# Altium PCB PCB_MainBoard_Final.PcbDoc
Units mm, origin at the board's own origin, x right, y up, seen from the top; angles counter-clockwise.
Board outline 88.65 x 83.57 mm, 2 copper layers (Top Layer, Bottom Layer); 24 components, 28 nets, 109 pads, 5 vias.
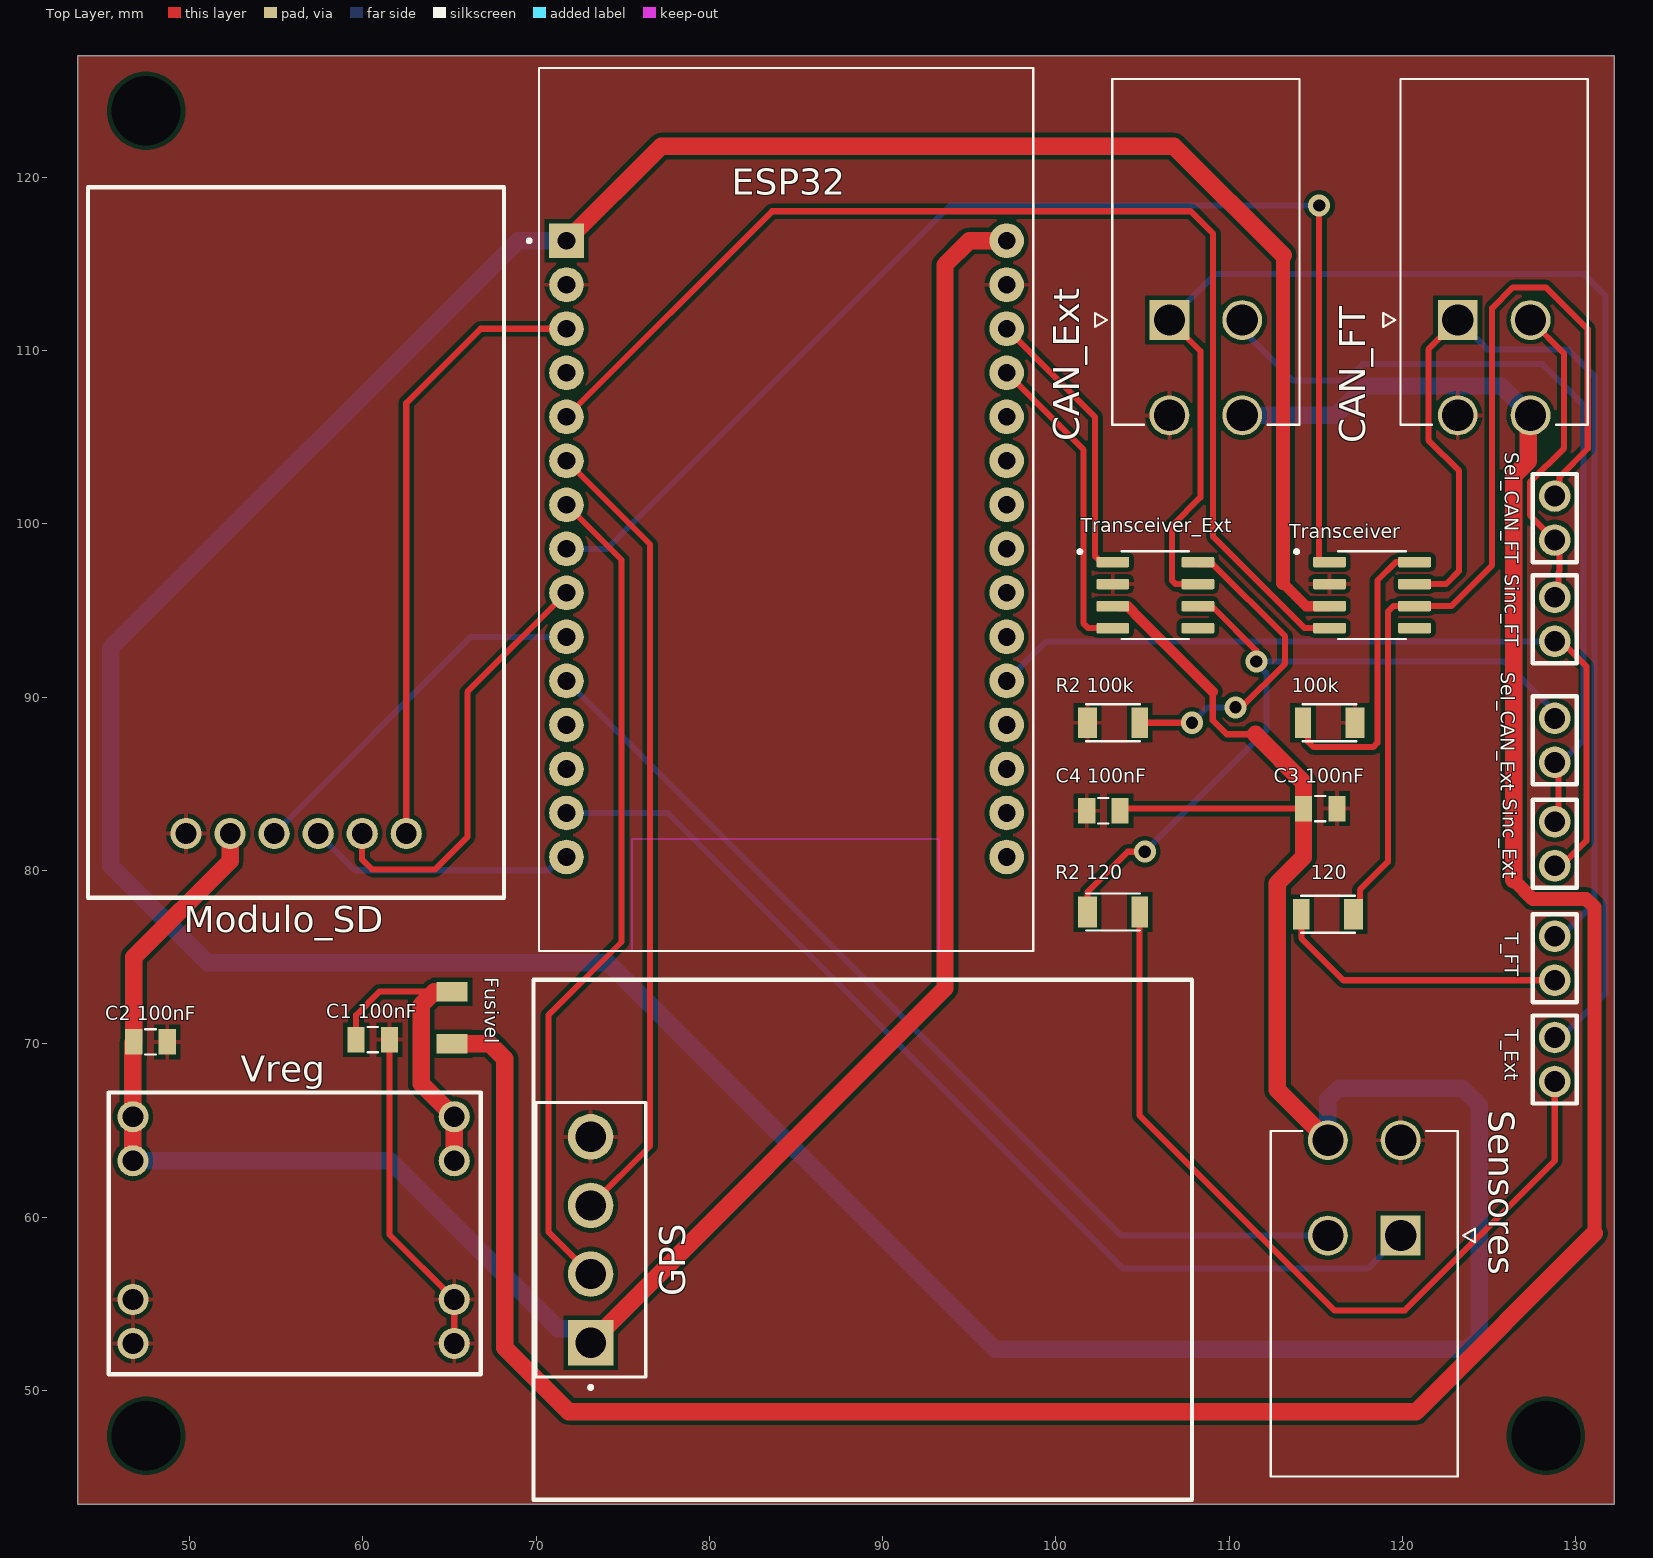
[diagram p0: Top Layer view]
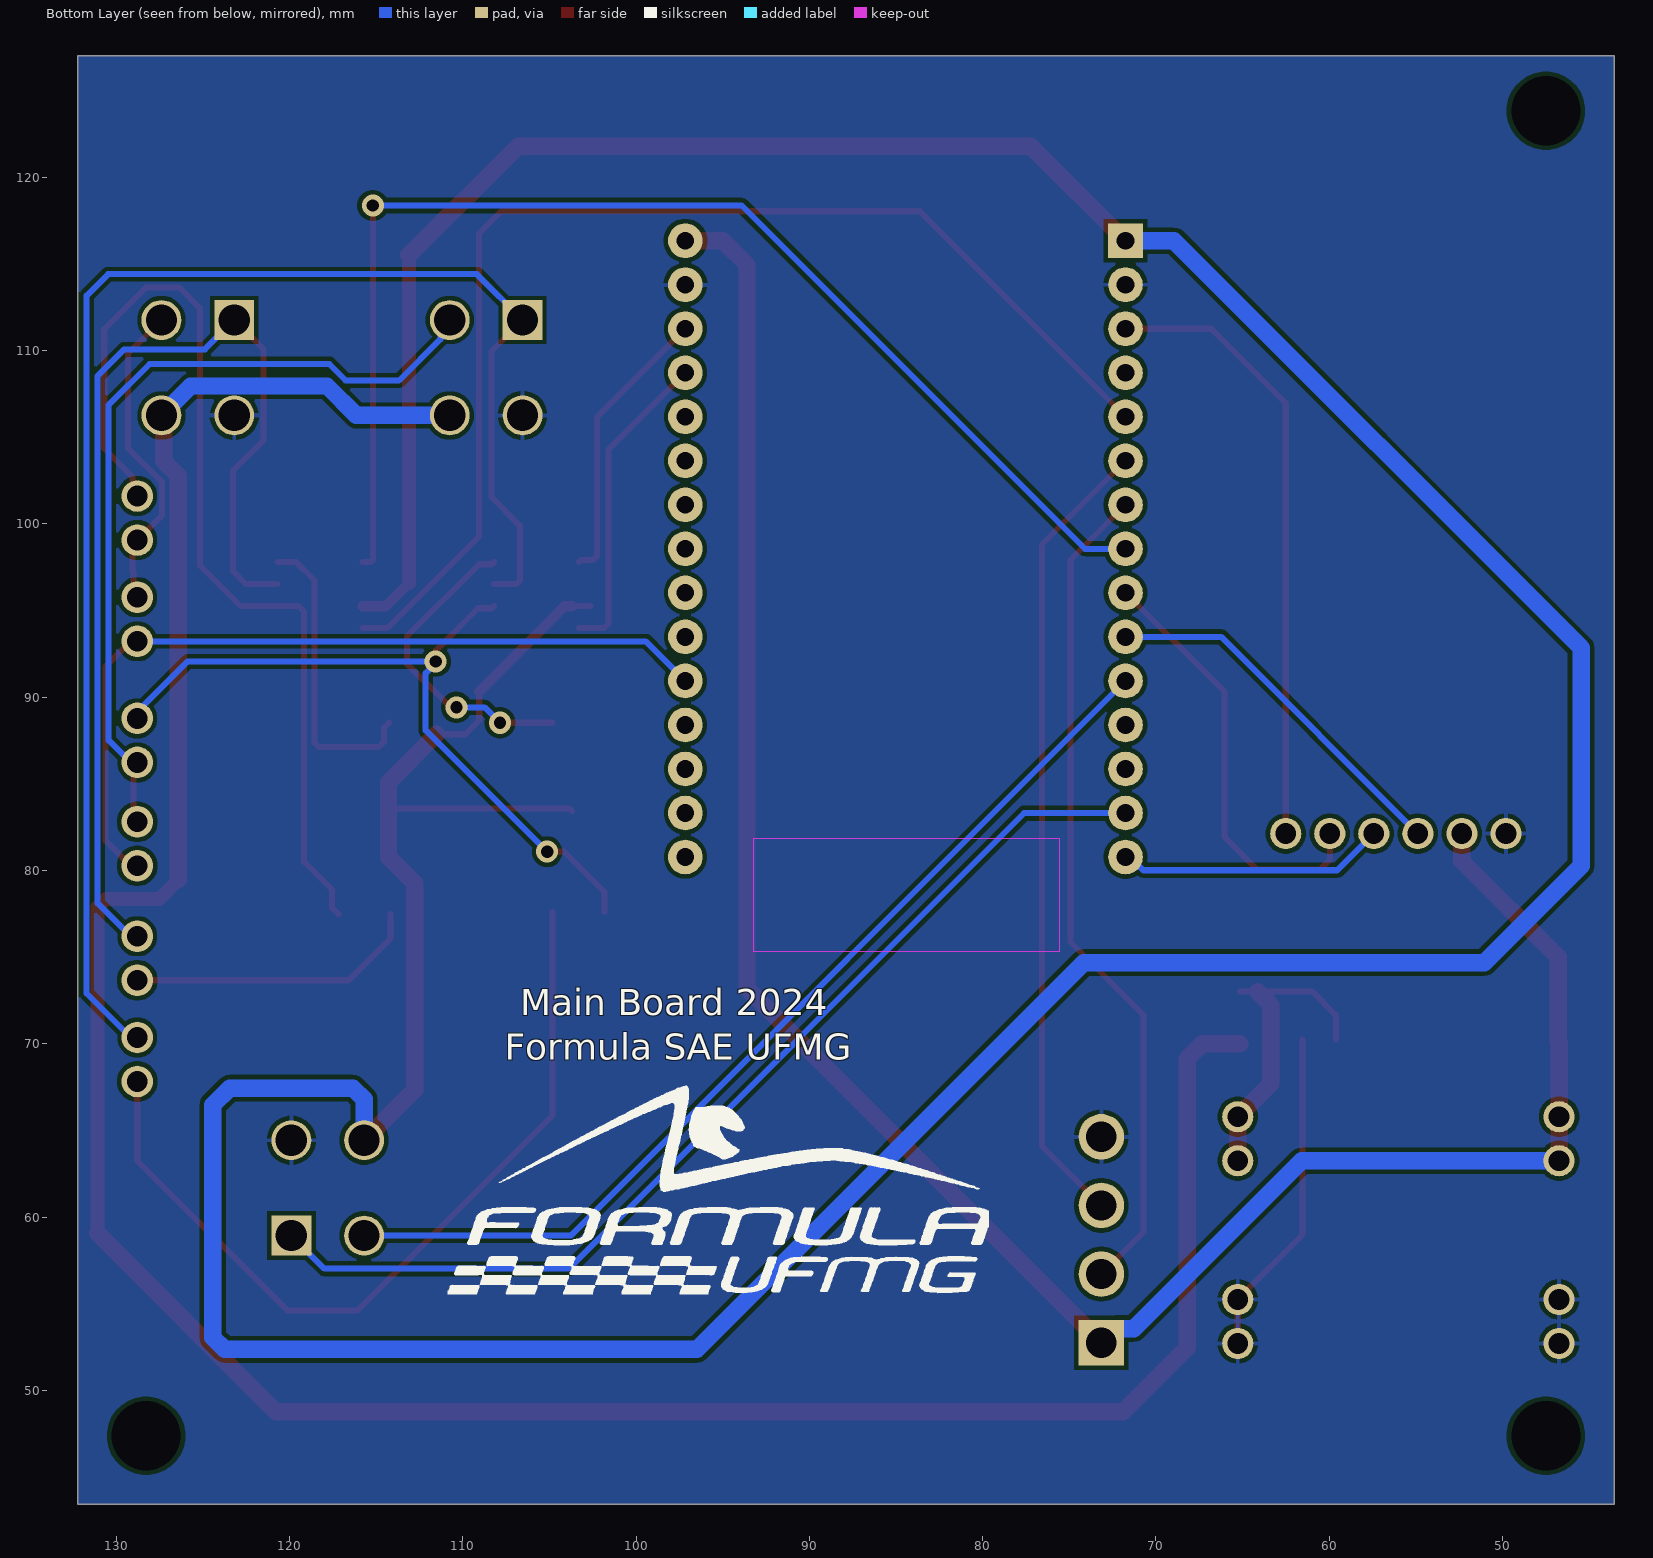
[diagram p1: Bottom Layer view, seen from below]

## Layer stack, top to bottom
Top Solder: solder mask 0.0102, Solder Resist, Dk 3.5
Top Layer: signal copper 0.0356
Dielectric 1: dielectric 0.32, FR-4, Dk 4.8
Bottom Layer: signal copper 0.0356
Bottom Solder: solder mask 0.0102, Solder Resist, Dk 3.5

## Board outline
43.561,43.434 132.207,43.434 132.207,127 43.561,127

## Design rules (kind name [scope] priority, off if disabled: settings)
Clearance [All] p1: gap=0.254 ignorepadtopadclearanceinfootprint=FALSE except(0: Arc-Hole Track-Hole SMDPad-Hole THPad-Hole Via-Hole Fill-Hole Poly-Hole Region-Hole Text-Hole; 0.35: Arc-SMDPad Arc-THPad Arc-Via Track-SMDPad Track-THPad Track-Via SMDPad-Via THPad-Via Via-Via)
PolygonConnect [All] p1: connectstyle=Relief reliefconductorwidth=0.254 reliefentries=4 polygonreliefangle="90 Angle" airgapwidth=0.254
RoutingVias [All] p1: holewidth=0.711 width=1.27 viastyle="Through Hole" minholewidth=0.711 minwidth=1.27 maxholewidth=0.711 maxwidth=1.27
SolderMaskExpansion [All] p1: expansion=0.102 istentingtop=FALSE
Width [All] p1: maxlimit=0.4 minlimit=0.254 preferedwidth=0.35 minimp=50.000000 maximp=50.000000 favimp=50.000000
30 further rules are at their usual default settings.

## Classes and differential pairs
component class Esquematico_MainBoard: 100k 120 "C1 100nF" "C2 100nF" "C3 100nF" "C4 100nF" Fusivel GPS Modulo_SD "R2 100k" "R2 120" Sensores Sinc_Ext Sinc_FT T_Ext T_FT

## Components (designator, comment, footprint, x,y, rotation, side; value= is the part's Value field where it differs from the comment)
100k "CRG1206F620K" RESC3115X65N 115.794,88.519 r180 top
120 "CRG1206F620K" RESC3115X65N 115.697,77.47 r180 top
"C1 100nF" "C2012X5R1E225M085AC" *CAPC2012X100N 60.579,70.231 r180 top
"C2 100nF" "C2012X5R1E225M085AC" *CAPC2012X100N 47.752,70.104 r180 top
"C3 100nF" "C2012X5R1E225M085AC" *CAPC2012X100N 115.244,83.566 r0 top
"C4 100nF" "C2012X5R1E225M085AC" *CAPC2012X100N 102.738,83.439 r180 top
CAN_Ext "874270402" MOLEX_874270402 106.544,111.757 r180 top
CAN_FT "874270402" MOLEX_874270402 123.181,111.757 r180 top
Fusivel "F1206B3R00FWTR" *FUSM3216X140N 65.151,71.501 r90 top
GPS "FWJ-04-01-T-S" SAMTEC_FWJ-04-01-T-S 73.152,58.688 r90 top
Modulo_SD "Component_1" MICROSD_MODULE 44.149,78.425 r0 top
"R2 100k" "CRG1206F620K" RESC3115X65N 103.288,88.519 r0 top
"R2 120" "CRG1206F620K" RESC3115X65N 103.288,77.597 r0 top
Sel_CAN_Ext "2Pin" 2Pin 128.778,86.233 r90 top
Sel_CAN_FT "2Pin" 2Pin 128.778,99.06 r90 top
Sensores "874270402" MOLEX_874270402 119.888,58.928 r0 top
Sinc_Ext "2Pin" 2Pin 128.778,80.264 r90 top
Sinc_FT "2Pin" 2Pin 128.778,93.218 r90 top
T_Ext "2Pin" 2Pin 128.778,67.818 r90 top
T_FT "2Pin" 2Pin 128.778,73.66 r90 top
Transceiver "MCP2551-E/SN" SOIC127P600X175-8N 118.237,95.885 r0 top
Transceiver_Ext "MCP2551-E/SN" SOIC127P600X175-8N 105.732,95.885 r0 top
Vreg "Component_1" PCBComponent_1 65.278,52.705 r180 top
? "ESP32-DEVKIT-V1" MODULE_ESP32_DEVKIT_V1 84.455,100.817 r0 top

## Footprints (in the part's own frame and the unit in brackets; to place one, negate y for a bottom-side part, rotate by r counter-clockwise, add the part's x,y. Pads: shape width x height; smd on the part's side, far side on the other; paste and mask are expansions set on the pad)
2Pin [mm]
  round 1.82 hole 1.2: 0(0,0) 1(2.54,0)
  silkscreen extent -1.27,-1.27 3.81,1.27, body extent -1.27,-1.19 3.79,1.27, height 8.54
*CAPC2012X100N [mm]
  rect 0.99x1.47 smd: 1(-0.965,0) 2(0.965,0)
  silkscreen extent -0.3,-0.73 0.3,0.73, body extent -1.05,-0.67 1.05,0.67, height 0.95
*FUSM3216X140N [mil]
  rect 44x71 smd: 1(-59,0) 2(59,0)
MICROSD_MODULE [mm]
  round 1.8 hole 1.2: 0(5.66,3.7) 1(8.2,3.7) 2(10.74,3.7) 3(13.28,3.7) 4(15.82,3.7) 5(18.36,3.7)
  silkscreen extent 0,0 24,41, body extent 0,-4.3 24,41.65, height 6.25
MODULE_ESP32_DEVKIT_V1 [mm]
  rect 2x2 / inner round 2 / far side rect 2x2 hole 1.02: 1(-12.7,15.515)
  round 2 hole 1.02: 2(-12.7,12.975) 3(-12.7,10.435) 4(-12.7,7.895) 5(-12.7,5.355) 6(-12.7,2.815) 7(-12.7,0.275) 8(-12.7,-2.265) 9(-12.7,-4.805) 10(-12.7,-7.345) 11(-12.7,-9.885) 12(-12.7,-12.425) 13(-12.7,-14.965) 14(-12.7,-17.505) 15(-12.7,-20.045) 16(12.7,-20.045) 17(12.7,-17.505) 18(12.7,-14.965) 19(12.7,-12.425) 20(12.7,-9.885) 21(12.7,-7.345) 22(12.7,-4.805) 23(12.7,-2.265) 24(12.7,0.275) 25(12.7,2.815) 26(12.7,5.355) 27(12.7,7.895) 28(12.7,10.435) 29(12.7,12.975) 30(12.7,15.515)
  Keep-Out Layer region: 8.78,-25.475 -8.91,-25.475 -8.91,-18.985 8.78,-18.985
  silkscreen extent -14.95,-25.48 14.23,25.48
MOLEX_874270402 [mm]
  rect 2.3x2.3 hole 1.8 mask+0.076: 1(0,0)
  round 2.3 hole 1.8 mask+0.076: 2(-4.2,0) 3(0,5.5) 4(-4.2,5.5)
  silkscreen extent -7.5,-13.9 4.3,6.04, body extent -7.62,-13.78 3.18,6.16, height 11.4
PCBComponent_1 [mm]
  round 1.8 hole 1.2: 1(0,0) 1(0,-2.54) 2(0,-10.541) 2(0,-13.081) 3(18.542,-10.541) 3(18.542,-13.081) 4(18.542,-2.54) 4(18.542,0)
  silkscreen extent -1.52,-14.48 19.94,1.78
RESC3115X65N [mm]
  rect 1.09x1.77 smd: 1(-1.465,0)
  rect 0.94x1.77 smd: 2(1.54,0)
  silkscreen extent -1.55,-1.07 1.55,1.07, body extent -1.6,-0.8 1.6,0.8, height 0.55
SAMTEC_FWJ-04-01-T-S [mm]
  rect 2.625x2.625 hole 1.75: 01(-5.94,0)
  round 2.625 hole 1.75: 02(-1.98,0) 03(1.98,0) 04(5.94,0)
  silkscreen extent -8.62,-3.18 7.92,3.18
SOIC127P600X175-8N [mm]
  rrect25% 1.9x0.6 smd: 1(-2.455,1.905) 2(-2.455,0.635) 3(-2.455,-0.635) 4(-2.455,-1.905) 5(2.455,-1.905) 6(2.455,-0.635) 7(2.455,0.635) 8(2.455,1.905)
  silkscreen extent -4.45,-2.53 1.95,2.6, body extent -3,-2.45 3,2.45, height 1.75

## Part data
100k 120 "R2 100k" "R2 120": "Res Thick Film 1206 620K Ohm 1% 0.25W_1/4W_ Â±100ppm/C Pad SMD T/R", Package="1206 TE Connectivity", Availability=Unavailable, MF="TE Connectivity", MP=CRG1206F620K, Price="0.00 USD", SnapEDA_Link=https://www.snapeda.com/parts/CRG1206F620K/TE%20Connectivity%20/%20DEUTSCH/view-part/?ref=snap
"C1 100nF" "C2 100nF" "C3 100nF" "C4 100nF": "Cap Ceramic 2.2uF 25V X5R 20% SMD 0805 85Â°C Punched Paper T/R", Package="0805 TDK", Availability=Unavailable, MF=TDK, MP=C2012X5R1E225M085AC, Price=None, SnapEDA_Link=https://www.snapeda.com/parts/C2012X5R1E225M085AC/TDK/view-part/?ref=snap
CAN_Ext CAN_FT Sensores: "Conn Wire to Board HDR 4 POS 4.2mm Solder RA Side Entry Thru-Hole Mini-Fit Jrâ„¢ Tray", Package=None, Availability="In Stock", Check_prices=https://www.snapeda.com/parts/874270402/Molex/view-part/?ref=eda, MF=Molex, MP=874270402, Price=None, Purchase-URL=https://pricing.snapeda.com/search/part/874270402/?ref=eda, SnapEDA_Link=https://www.snapeda.com/parts/874270402/Molex/view-part/?ref=snap
Fusivel: "F1206B Series Fast Acting 63 V 3 A 1206 Surface Mount Thin-Film Fuse T&R", Package="1206 AVX", Availability=Unavailable, MF=AVX, MP=F1206B3R00FWTR, Price=None, SnapEDA_Link=https://www.snapeda.com/parts/F1206B3R00FWTR/AVX%20/%20Kyocera/view-part/?ref=snap
GPS: "Connector Header Through Hole 4 position 0.156 (3.96mm)", Package=None, Availability=Bad, Check_prices=https://www.snapeda.com/parts/FWJ-04-01-T-S/Samtec/view-part/3573755/?ref=eda, MF=Samtec, MP=FWJ-04-01-T-S, Price=None, Purchase-URL=https://pricing.snapeda.com/search/part/FWJ-04-01-T-S/?ref=eda, SnapEDA_Link=https://www.snapeda.com/parts/FWJ-04-01-T-S/Samtec/view-part/3573755/?ref=snap
Transceiver Transceiver_Ext: "1/1 Transceiver Half CANbus 8-SOIC", Package="SOIC-8 Microchip", Availability="In Stock", Check_prices=https://www.snapeda.com/parts/MCP2551-E/SN/Microchip/view-part/?ref=eda, MF=Microchip, MP=MCP2551-E/SN, Price=None, Purchase-URL=https://pricing.snapeda.com/search/part/MCP2551-E/SN/?ref=eda, SnapEDA_Link=https://www.snapeda.com/parts/MCP2551-E/SN/Microchip/view-part/?ref=snap
?: "Dual core, Wi-Fi: 2.4 GHz up to 150 Mbits/s,BLE (Bluetooth Low Energy) and legacy Bluetooth, 32 bits, Up to 240 MHz", Package=None, Availability="Not in stock", Check_prices=https://www.snapeda.com/parts/ESP32-DEVKIT-V1/Do+it/view-part/?ref=eda, MF="Do it", MP=ESP32-DEVKIT-V1, Price=None, SnapEDA_Link=https://www.snapeda.com/parts/ESP32-DEVKIT-V1/Do+it/view-part/?ref=snap

## Free pads (board coordinates)
  round 1.524 hole 4: 3(47.498,47.371) 3(47.498,123.825) 3(128.27,47.371)

## Via types
v1: diameter 1.27, hole 0.711, Top Layer to Bottom Layer, 5 vias

## Nets (pads, with @x,y where several pads share a name; then routed paths per layer and width w, separated by ;. In a path a pad name is that pad's centre, name@x,y a point inside that pad or via, vN(x,y) a via of type N, cw(c..) or ccw(c..) an arc to the next point about the centre after c; other vN are vias at no path point)
GND: 100k.1 "C1 100nF.1" "C2 100nF.1" "C3 100nF.2" "C4 100nF.2" "R2 100k.1" ?.2 ?.29 CAN_Ext.3 CAN_FT.3 GPS.04 Modulo_SD.0 Sensores.3 Transceiver.2 Transceiver_Ext.2 Vreg.1 Vreg.4 | length 19.1
  Top Layer w0.35: 61.544,70.231 61.544,58.979 65.278,55.245 Vreg.1@65.278,52.705
Net100k_2: 100k.2 Transceiver.8 | length 17.4
  Top Layer w0.35: 100k.2 114.549,88.224 114.549,87.418 114.858,87.109 118.298,87.109 118.547,87.358 118.547,96.729 119.609,97.79 Transceiver.8
Net120_1: 120.1 Sel_CAN_FT.1 Transceiver.6 | length 57.7
  Top Layer w0.35: 120.1 117.532,77.84 117.532,78.873 119.151,80.493 119.151,94.932 119.469,95.25 Transceiver.6 122.809,95.25 125.171,97.612 125.171,112.446 126.365,113.64 128.27,113.64 130.683,111.227 130.683,104.343 129.059,102.719 129.059,101.881 Sel_CAN_FT.1
Net120_2: 120.2 T_FT.0 | length 17
  Top Layer w0.35: 120.2 114.157,76.089 116.586,73.66 T_FT.0
Net_1: "C3 100nF.1" "C4 100nF.1" ?.1 Sensores.4 Transceiver.3 Transceiver_Ext.3 | length 282.9
  Top Layer w0.35: Transceiver_Ext.3@102.627,95.25 Transceiver_Ext.3 Transceiver_Ext.3@103.676,95.25 ; 103.703,83.439 103.83,83.566 114.279,83.566 ; 109.045,90.319 109.045,88.664 109.855,87.855 111.51,87.855
  Top Layer w0.6: Transceiver_Ext.3@103.676,95.25 104.132,95.25 104.876,94.505 104.876,94.488 109.045,90.319 ; 113.106,96.571 114.427,95.25 Transceiver.3
  Top Layer w0.8: 113.106,96.571 113.106,115.494
  Top Layer w1: ?.1 77.216,121.793 106.807,121.793 113.106,115.494 ; 111.51,87.855 114.279,85.086 114.279,83.566 114.279,80.751 112.776,79.248 112.776,67.34 Sensores.4
  Bottom Layer w1: ?.1 68.961,116.332 45.466,92.837 45.466,80.264 51.054,74.676 74.168,74.676 96.483,52.361 123.735,52.361 124.421,53.047 124.421,66.46 123.444,67.437 116.332,67.437 115.688,66.793 Sensores.4
Net_3: ?.3 Modulo_SD.5 | length 35.9
  Top Layer w0.35: Modulo_SD.5 62.509,106.959 66.802,111.252 ?.3
Net_5: ?.5 Transceiver.4 | length 69.1
  Top Layer w0.35: ?.5 83.617,118.034 107.772,118.034 109.068,116.738 109.068,99.263 114.351,93.98 Transceiver.4
Net_6: ?.6 GPS.03 | length 46.4
  Top Layer w0.35: ?.6 76.581,98.806 76.581,64.097 GPS.03
Net_7: ?.7 GPS.02 | length 48.5
  Top Layer w0.35: ?.7 74.93,97.917 74.93,75.87 70.71,71.65 70.71,59.15 GPS.02
Net_8: ?.8 Transceiver.1 | length 72.7
  Top Layer w0.35: v1(115.189,118.364) 115.189,97.915 115.314,97.79 Transceiver.1
  Bottom Layer w0.35: ?.8 74.092,98.552 93.904,118.364 v1(115.189,118.364)
Net_9: ?.9 Modulo_SD.4 | length 25
  Top Layer w0.35: Modulo_SD.4 59.969,80.62 60.533,80.056 64.181,80.056 66.04,81.915 66.04,90.297 ?.9
Net_10: ?.10 Modulo_SD.2 | length 21.6
  Bottom Layer w0.35: Modulo_SD.2 66.236,93.472 ?.10
Net_11: ?.11 Sensores.2 | length 57.2
  Bottom Layer w0.35: ?.11 103.759,58.928 Sensores.2
Net_14: ?.14 Sensores.1 | length 59.8
  Bottom Layer w0.35: ?.14 77.597,83.312 103.886,57.023 117.983,57.023 Sensores.1
Net_15: ?.15 Modulo_SD.3 | length 15.5
  Bottom Layer w0.35: Modulo_SD.3 59.543,80.01 70.725,80.01 71.487,80.772 ?.15
Net_20: ?.20 Sinc_Ext.0 Sinc_FT.0 | length 47.5
  Top Layer w0.35: Sinc_Ext.0 129.159,80.264 130.607,81.712 130.607,91.77 129.159,93.218 Sinc_FT.0
  Bottom Layer w0.35: ?.20 99.441,93.218 Sinc_FT.0
Net_27: ?.27 Transceiver_Ext.4 | length 18.1
  Top Layer w0.35: ?.27 101.6,104.267 101.6,94.234 101.854,93.98 103.25,93.98 Transceiver_Ext.4
Net_28: ?.28 Transceiver_Ext.1 | length 16.4
  Top Layer w0.35: ?.28 102.26,106.147 102.26,98.12 102.465,97.915 103.173,97.915 Transceiver_Ext.1@103.298,97.79
Net_30: "C2 100nF.2" ?.30 GPS.01 Modulo_SD.1 Vreg.3 | length 126.8
  Top Layer w0.35: 46.736,70.053 46.787,70.104
  Top Layer w1: Vreg.3@46.736,63.246 46.736,65.786 46.736,70.053 ; 46.787,70.104 46.787,74.981 52.349,80.543 Modulo_SD.1 ; GPS.01 93.599,73.195 93.599,114.935 94.996,116.332 ?.30
  Bottom Layer w1: Vreg.3@46.736,63.246 61.595,63.246 71.281,53.56 72.34,53.56 GPS.01
"NetC1 100nF_2": "C1 100nF.2" Fusivel.2 Vreg.2 | length 18.4
  Top Layer w0.35: 59.614,70.231 59.614,71.654 60.96,73 64.135,73 Fusivel.2
  Top Layer w1: 64.135,73 63.373,72.238 63.373,67.691 65.278,65.786 Vreg.2@65.278,63.246
NetCAN_Ext_1: CAN_Ext.1 T_Ext.1 Transceiver_Ext.7 | length 89
  Top Layer w0.35: CAN_Ext.1 108.331,109.97 108.331,101.524 106.705,99.898 106.705,96.725 106.91,96.52 108.066,96.52 Transceiver_Ext.7
  Bottom Layer w0.35: CAN_Ext.1 109.189,114.402 130.454,114.402 131.699,113.157 131.699,72.898 129.159,70.358 T_Ext.1
NetCAN_Ext_2: CAN_Ext.2 Sel_CAN_Ext.0 Sinc_Ext.1 | length 48
  Top Layer w0.35: Sinc_Ext.1 128.984,83.01 128.984,86.027 Sel_CAN_Ext.0
  Bottom Layer w0.35: CAN_Ext.2 110.744,111.229 111.295,110.679 111.295,110.639 113.665,108.269 116.75,108.269 117.701,109.22 128.067,109.22 130.429,106.858 130.429,87.503 129.159,86.233 Sel_CAN_Ext.0
NetCAN_Ext_4: CAN_Ext.4 CAN_FT.4 Fusivel.1 | length 158.1
  Top Layer w0.8: 126.414,79.453 127.508,78.359 130.595,78.359 131.064,77.89 131.064,59.055
  Top Layer w1: Fusivel.1 67.324,70.002 68.199,69.128 68.199,52.451 71.882,48.768 120.777,48.768 131.064,59.055 ; 126.414,79.453 126.414,102.78 127.242,103.607 127.242,106.117 CAN_FT.4
  Bottom Layer w1: CAN_Ext.4 116.138,106.257 117.831,107.95 125.688,107.95 CAN_FT.4
NetCAN_FT_1: CAN_FT.1 T_FT.1 Transceiver.7 | length 61.5
  Top Layer w0.35: Transceiver.7 122.504,96.52 123.266,97.282 123.266,103.048 121.488,104.826 121.488,110.064 CAN_FT.1
  Bottom Layer w0.35: CAN_FT.1 124.88,110.058 129.54,110.058 131.064,108.534 131.064,78.105 129.159,76.2 T_FT.1
NetCAN_FT_2: CAN_FT.2 Sel_CAN_FT.0 Sinc_FT.1 | length 18.4
  Top Layer w0.35: CAN_FT.2 129.318,109.82 129.318,104.37 127.343,102.395 127.343,100.495 Sel_CAN_FT.0 129.059,98.779 129.059,97.268 128.984,97.193 128.984,95.964 Sinc_FT.1
"NetR2 100k_2": "R2 100k.2" Transceiver_Ext.8 | length 18.2
  Top Layer w0.35: 104.828,88.519 v1(107.848,88.519) ; Transceiver_Ext.8 108.312,97.665 109.058,97.665 113.219,93.504 113.219,91.934 110.693,89.408 v1(110.363,89.408)
  Bottom Layer w0.35: v1(107.848,88.519) 108.737,89.408 v1(110.363,89.408)
"NetR2 120_1": "R2 120.1" Sel_CAN_Ext.1 Transceiver_Ext.6 | length 43.4
  Top Layer w0.35: 101.823,77.597 101.823,78.76 104.14,81.077 v1(105.131,81.077) ; Transceiver_Ext.6@108.199,95.25 108.324,95.125 109.116,95.125 111.557,92.685 v1(111.557,92.05)
  Bottom Layer w0.35: v1(105.131,81.077) 112.141,88.087 112.141,91.385 111.557,91.969 v1(111.557,92.05) 125.882,92.05 128.778,89.154 Sel_CAN_Ext.1
"NetR2 120_2": "R2 120.2" T_Ext.0 | length 48.5
  Top Layer w0.35: 104.828,77.597 104.828,65.85 116.068,54.61 120.132,54.61 128.778,63.256 T_Ext.0
pads on no net: ?.4 ?.12 ?.13 ?.16 ?.17 ?.18 ?.19 ?.21 ?.22 ?.23 ?.24 ?.25 ?.26 Transceiver.5 Transceiver_Ext.5

## Polygon pours and split planes (outlines as drawn)
GND on Top Layer "NONET_L01_P-001" (solid, pour order 0): 43.561,127 43.561,43.434 132.207,43.434 132.207,127
GND on Bottom Layer "NONET_L01_P-001" (solid, pour order 1): 43.561,127 43.561,43.434 132.207,43.434 132.207,127

## Silkscreen, mask and mechanical layers (free items; w line width, h text height)
Top Overlay:
  lines w0.254: 69.85,43.688 107.85,43.688 107.85,73.688 69.85,73.688 69.85,43.688
  text "ESP32" at 81.28,118.999 h1.52
Bottom Overlay:
  drawing of 19 lines, arcs and shapes, not listed
  text "Main Board 2024" at 106.68,71.628 h1.52
  text "Formula SAE UFMG" at 107.569,69.088 h1.52